# EAGLE board PCB_final (EAGLE 9.7.0)
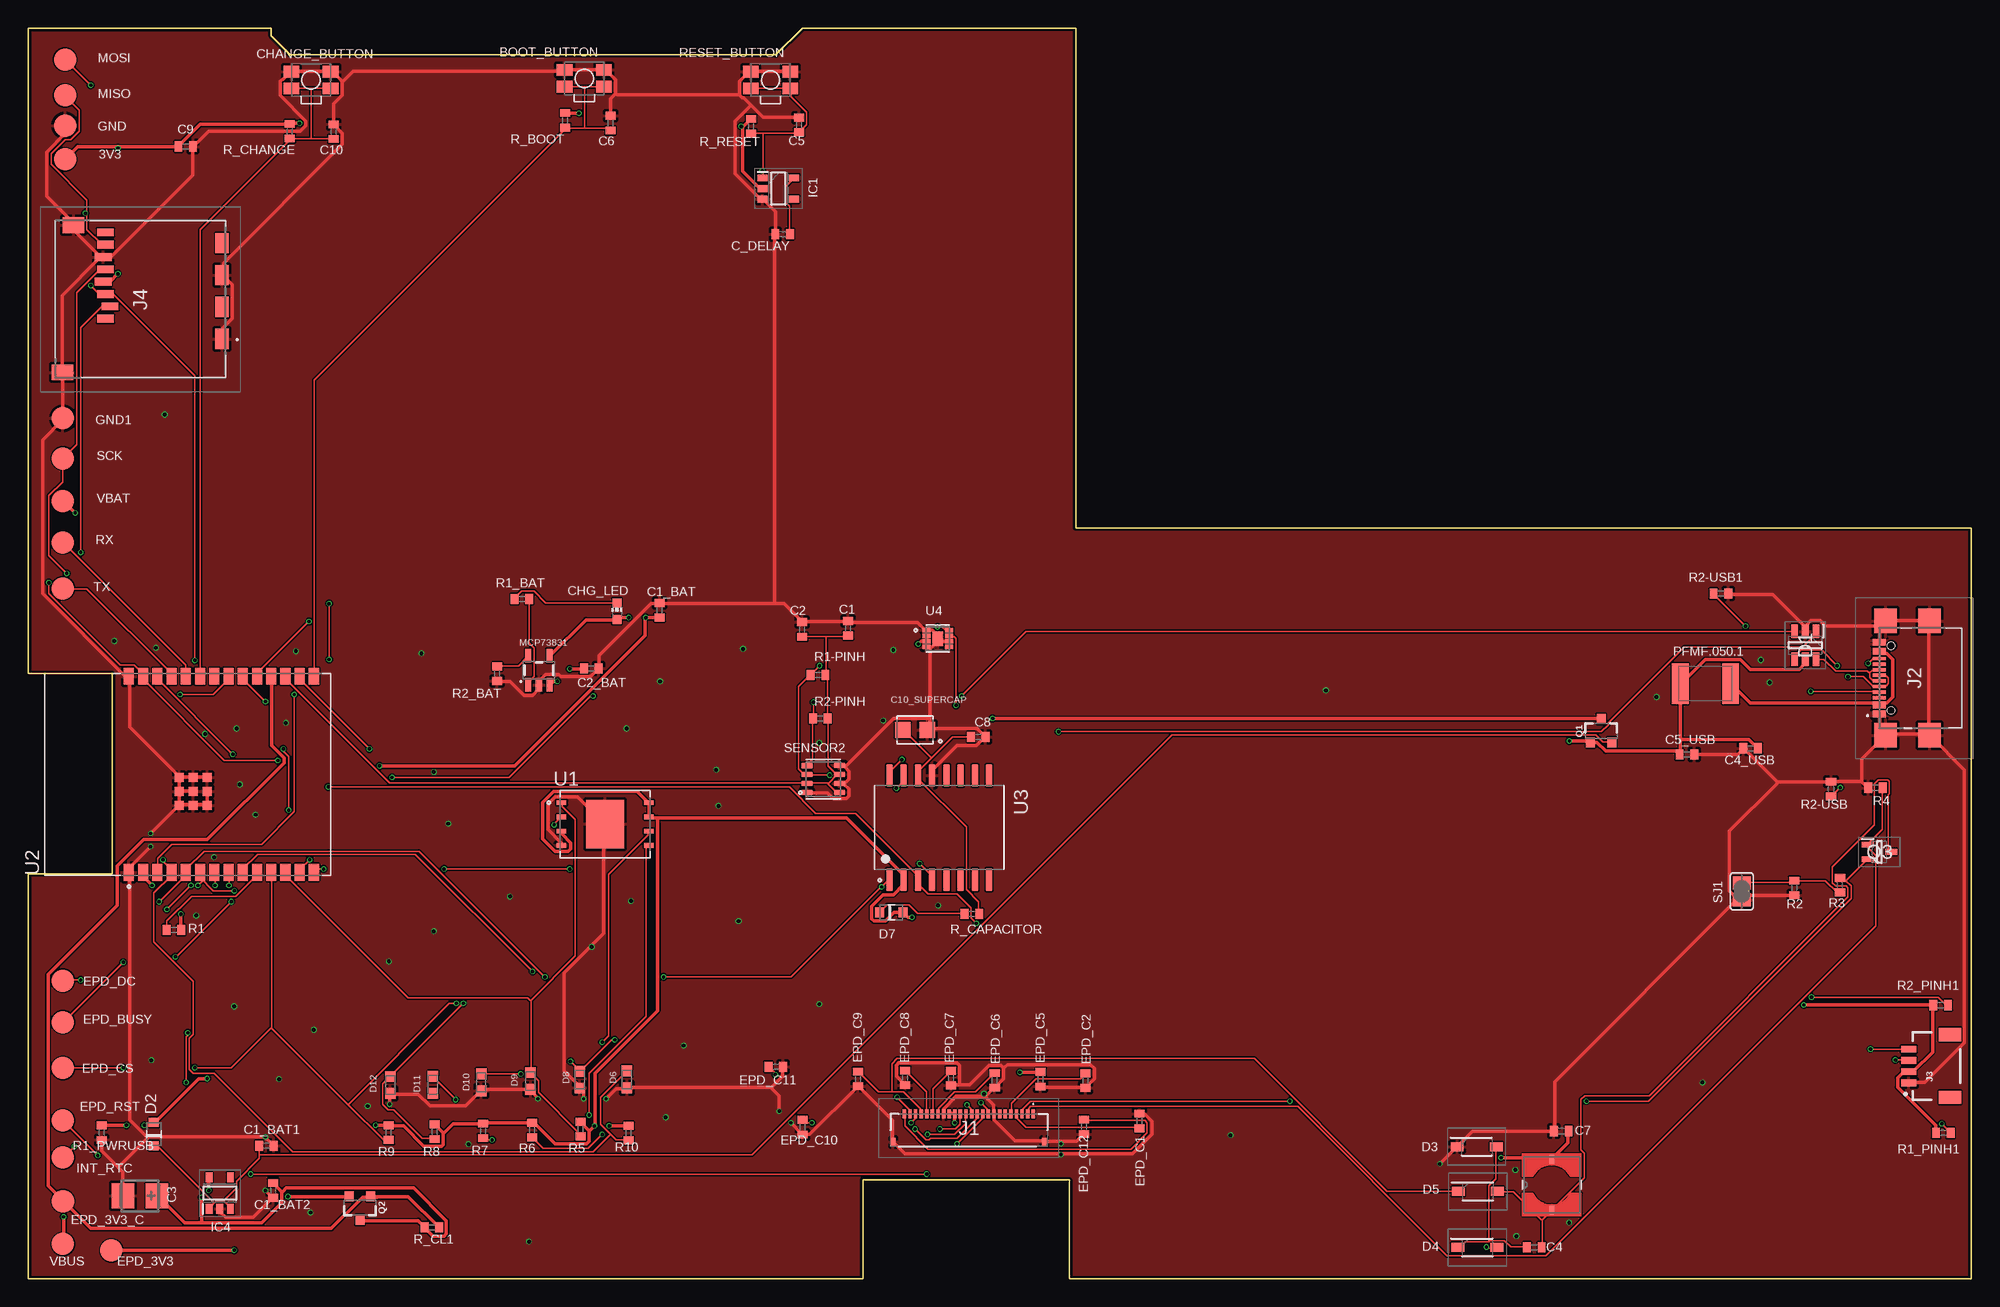
[diagram p0: board, top side]
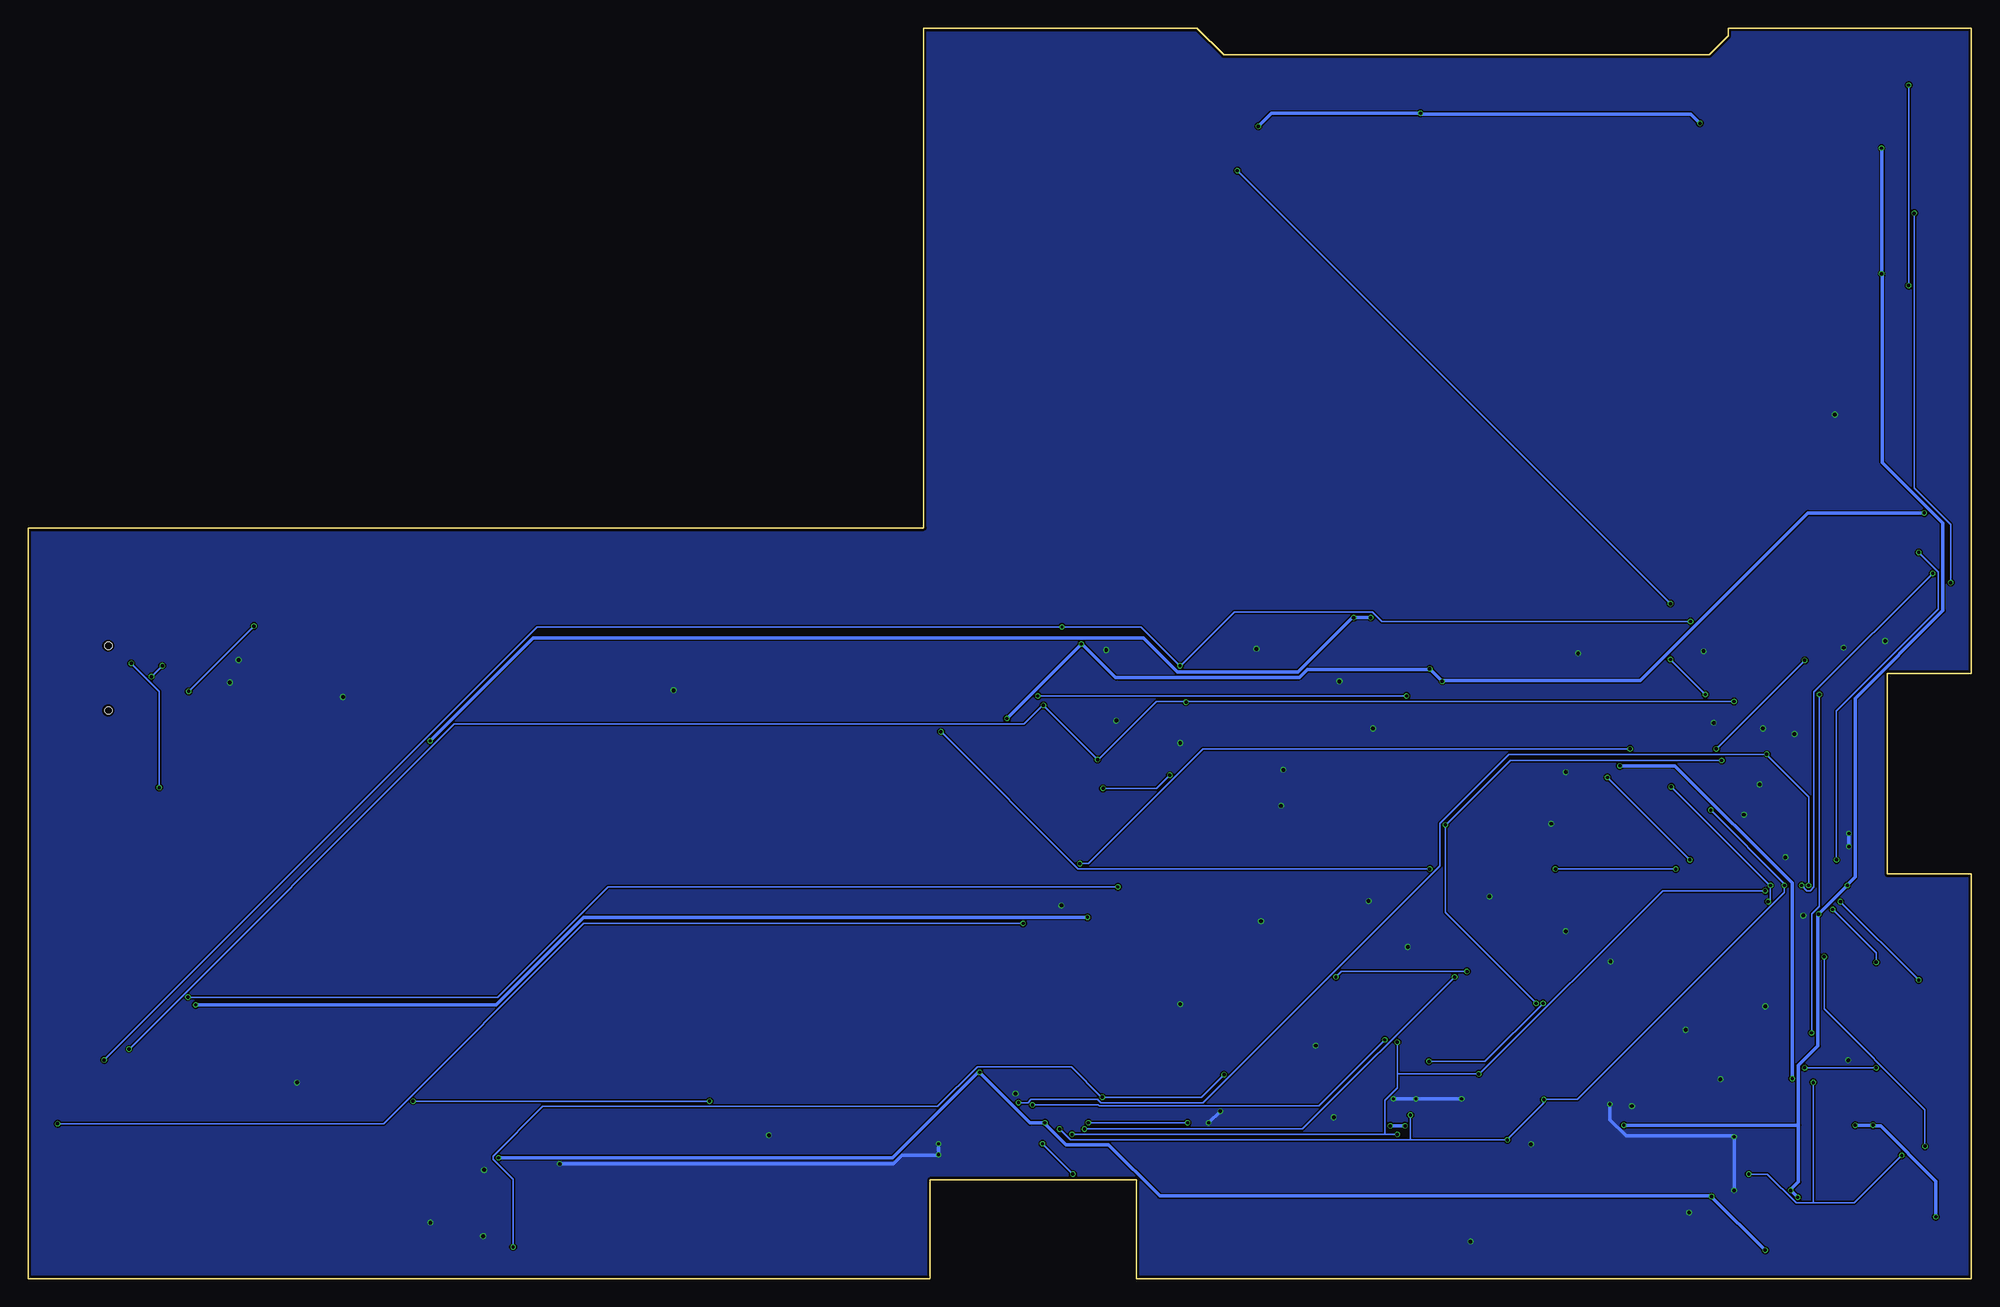
[diagram p1: board, bottom side, seen from below]

Size 173.4 x 111.6 mm. Coordinates in mm from the lower left corner, seen from the top.
Outline: 0,0 74.5,0 74.5,8.8 92.9,8.8 92.9,0 173.4,0 173.4,67 93.5,67 93.5,111.6 69.1,111.6 66.7,109.2 23.4,109.2 21.7,110.9 21.7,111.6 0,111.6 0,54 7.5,54 7.5,36.1 0,36.1 0,0
Copper layers (1*16): Top 0.035mm / dielectric 1.6mm / Bottom 0.035mm
Design rules "jlcpcb-2layers.dru": minimum track width 0.15mm, minimum drill 0.3mm, track to track 5mil, track to pad 5mil, pad to pad 5mil, via to via 5mil, smd to smd 5mil, copper to edge 0.2mm, drill to drill 6mil, minimum pad ring 10mil, minimum via ring 3mil, stop-mask expansion 4mil, vias tented up to drill 0mil, thermal gap 10mil
Net classes: 1 class-1: width 0.3 mm

## Footprints (pad centres in the part's own frame; a part is rotated, then mirrored left to right if it is on the bottom)
TP20R = smd 2 x 2: TP 0,0
MYBUTTON = smd 1.4 x 1.05: 1 1.75,0.75; 2 -1.75,0.75; 3 -1.75,-0.75; 4 1.75,-0.75
ESP32_WROVER_EAGLE-LTSPICE_C0402 = smd 0.7 x 0.9: 1 -0.65,0; 2 0.65,0
RCL_CT3528 = smd 2 x 2.2: + -1.5,0; - 1.5,0
CAPCP3225X100N = smd 1.4 x 1.4: 1 -1.1,0; 2 1.1,0
ADAFRUIT_CHIP-LED0603 = smd 0.8 x 0.8: A 0,-0.75; C 0,0.75
SOT95P280X145-6N = smd 1.2 x 0.6: 1 -1.25,0.95; 2 -1.25,0; 3 -1.25,-0.95; 4 1.25,-0.95; 5 1.25,0; 6 1.25,0.95
ESP32_WROVER_AVX---SD0805S020S1R0_AVX_SD0805S020S1R0_0 = smd 0.8 x 0.9: 1 -1.05,0; 2 1.05,0
SOD3716X135N = smd 1.15 x 0.8: 1 -1.75,0; 2 1.75,0
DIOC1608X36N = smd 0.97 x 0.94: 1 -0.75,0; 2 0.75,0
SOT95P280X125-5N = smd 0.9 x 0.6: 1 -1.4,0.95; 2 -1.4,0; 3 -1.4,-0.95; 4 1.4,-0.95; 5 1.4,0.95
SOT95P280X120-5N = smd 0.9 x 0.6: 1 -1.4,0.95; 2 -1.4,0; 3 -1.4,-0.95; 4 1.4,-0.95; 5 1.4,0.95
FH34SRJ24S05SH99 = smd 0.3 x 0.8: 1 5.75,1.45; 2 5.25,1.45; 3 4.75,1.45; 4 4.25,1.45; 5 3.75,1.45; 6 3.25,1.45; 7 2.75,1.45; 8 2.25,1.45; 9 1.75,1.45; 10 1.25,1.45; 11 0.75,1.45; 12 0.25,1.45; 13 -0.25,1.45; 14 -0.75,1.45; 15 -1.25,1.45; 16 -1.75,1.45; 17 -2.25,1.45; 18 -2.75,1.45; 19 -3.25,1.45; 20 -3.75,1.45; 21 -4.25,1.45; 22 -4.75,1.45; 23 -5.25,1.45; 24 -5.75,1.45 | smd 0.4 x 0.8: MP1 6.75,-1.05; MP2 -6.75,-1.05
SAMACSYS_PARTS_USB4110GFA = smd 0.3 x 1.15: A1 -3.35,3.678; A4 -2.55,3.678; A5 -1.25,3.678; A6 -0.25,3.678; A7 0.25,3.678; A8 1.25,3.678; A9 2.55,3.678; A12 3.35,3.678; B1 3.05,3.678; B4 2.25,3.678; B5 1.75,3.678; B6 0.75,3.678; B7 -0.75,3.678; B8 -1.75,3.678; B9 -2.25,3.678; B12 -3.05,3.678 | smd 2.18 x 2: MP1 -5.11,-0.827; MP2 5.11,-0.827; MP3 -5.11,3.103; MP4 5.11,3.103 | hole 0.65: -2.89,2.603; 2.89,2.603
JST04_1MM_RA = smd 0.6 x 1.35: 1 -1.5,0; 2 -0.5,0; 3 0.5,0; 4 1.5,0 | smd 1.2 x 2: NC1 2.8,-3.675; NC2 -2.8,-3.675
112ATAARR03ATTEND = smd 1.8 x 1.2: G1 10.6,10.4; G2 4.9,10.4; S1 7.75,10.4; S2 2.05,10.4 | smd 1.4 x 1.9: G3 13.6,-3.85; G4 0.45,-2.85 | smd 0.7 x 1.5: P1 8.8,0; P2 7.7,0.4; P3 6.6,0; P4 5.5,-0.2; P5 4.4,0; P6 3.3,-0.2; P7 2.2,0; P8 1.1,0
IND_4828-WE-TPC_WRE = smd 0.813 x 0.406: 1 -2.286,0; 2 2.286,0
ESP32_WROVER_SPARKFUN-IC-POWER_SOT23-5 = smd 0.55 x 1.2: 1 -0.95,-1.3; 2 0,-1.3; 3 0.95,-1.3; 4 0.95,1.3; 5 -0.95,1.3
ESP32C6_VARISTOR_CT/CN1812 = smd 1.5 x 3.6: 1 -2.25,0; 2 2.25,0
ESP32_WROVER_SPARKFUN-DISCRETESEMI_SOT23-3 = smd 0.8 x 0.9: 1 -0.95,-1; 2 0.95,-1; 3 0,1.1
SOT65P210X110-3N = smd 1.05 x 0.5: 1 -1.05,0.65; 2 -1.05,-0.65; 3 1.05,0
ESP32_WROVER_EAGLE-LTSPICE_R0402 = smd 0.7 x 0.9: 1 -0.65,0; 2 0.65,0
ESP32_WROVER_BME680_PSON80P300X300X100-8N = smd 1.016 x 0.5: 1 1.458,1.2; 2 1.458,0.4; 3 1.458,-0.4; 4 1.458,-1.2; 5 -1.458,-1.22; 6 -1.458,-0.4; 7 -1.458,0.4; 8 -1.458,1.2
SJ = smd 1.168 x 1.6: 1 -0.762,0; 2 0.762,0
SON127P600X800X80-9N = smd 0.94 x 0.44: 1 -3.895,1.905; 2 -3.895,0.635; 3 -3.895,-0.635; 4 -3.895,-1.905; 5 3.895,-1.905; 6 3.895,-0.635; 7 3.895,0.635; 8 3.895,1.905 | smd 3.4 x 4.3: 9 0,0
XCVR_ESP32-C6-WROOM-1-N8 = smd 1.5 x 0.9: 1 -8.75,5.26; 2 -8.75,3.99; 3 -8.75,2.72; 4 -8.75,1.45; 5 -8.75,0.18; 6 -8.75,-1.09; 7 -8.75,-2.36; 8 -8.75,-3.63; 9 -8.75,-4.9; 10 -8.75,-6.17; 11 -8.75,-7.44; 12 -8.75,-8.71; 13 -8.75,-9.98; 14 -8.75,-11.25; 15 8.75,-11.25; 16 8.75,-9.98; 17 8.75,-8.71; 18 8.75,-7.44; 19 8.75,-6.17; 20 8.75,-4.9; 21 8.75,-3.63; 22 8.75,-2.36; 23 8.75,-1.09; 24 8.75,0.18; 25 8.75,1.45; 26 8.75,2.72; 27 8.75,3.99; 28 8.75,5.26 | smd 0.8 x 0.8: 29_1 -2.755,0.79; 29_2 -1.505,0.79; 29_3 -0.255,0.79; 29_4 -2.755,-0.46; 29_5 -1.505,-0.46; 29_6 -0.255,-0.46; 29_7 -2.755,-1.71; 29_8 -1.505,-1.71; 29_9 -0.255,-1.71
SOIC127P1032X265-16N = smd 2.05 x 0.59: 1 -4.655,4.445; 2 -4.655,3.175; 3 -4.655,1.905; 4 -4.655,0.635; 5 -4.655,-0.635; 6 -4.655,-1.905; 7 -4.655,-3.175; 8 -4.655,-4.445; 9 4.655,-4.445; 10 4.655,-3.175; 11 4.655,-1.905; 12 4.655,-0.635; 13 4.655,0.635; 14 4.655,1.905; 15 4.655,3.175; 16 4.655,4.445
SON50P200X200X80-9N = smd 0.813 x 0.406: 1 -0.985,0.75; 2 -0.985,0.25; 3 -0.985,-0.25; 4 -0.985,-0.75; 5 0.985,-0.75; 6 0.985,-0.25; 7 0.985,0.25; 8 0.985,0.75 | smd 0.9 x 1.3: 9 0,0

## Placement (x,y rotation side)
3V3  TPMODEL  [TP20R]  3.32,99.89 0 top
BOOT_BUTTON  BUTTON_CUSYOMV1BUTON  [MYBUTTON]  49.63,107.11 0 top
C1  100nF  [ESP32_WROVER_EAGLE-LTSPICE_C0402]  73.17,58.05 90 top
C1_BAT  4.7uF  [ESP32_WROVER_EAGLE-LTSPICE_C0402]  56.35,59.64 90 top
C1_BAT1  4.7uF  [ESP32_WROVER_EAGLE-LTSPICE_C0402]  21.28,11.87 0 top
C1_BAT2  4.7uF  [ESP32_WROVER_EAGLE-LTSPICE_C0402]  21.87,7.88 270 top
C2  100nF  [ESP32_WROVER_EAGLE-LTSPICE_C0402]  69.07,57.93 90 top
C2_BAT  4.7uF  [ESP32_WROVER_EAGLE-LTSPICE_C0402]  50.25,54.45 0 top
C3  100uF TANT  [RCL_CT3528]  9.99,7.4 180 top
C4  4.7uF/25V  [ESP32_WROVER_EAGLE-LTSPICE_C0402]  134.39,2.79 0 top
C4_USB  100nF  [ESP32_WROVER_EAGLE-LTSPICE_C0402]  153.7,47.33 180 top
C5  1uF  [ESP32_WROVER_EAGLE-LTSPICE_C0402]  68.79,102.95 90 top
C5_USB  4.7uF  [ESP32_WROVER_EAGLE-LTSPICE_C0402]  148.01,46.77 0 top
C6  100nF  [ESP32_WROVER_EAGLE-LTSPICE_C0402]  51.97,103.11 90 top
C7  10uF  [ESP32_WROVER_EAGLE-LTSPICE_C0402]  136.8,13.17 180 top
C8  100nF  [ESP32_WROVER_EAGLE-LTSPICE_C0402]  84.79,48.33 0 top
C9  100nF  [ESP32_WROVER_EAGLE-LTSPICE_C0402]  14.07,101.03 0 top
C10  100nF  [ESP32_WROVER_EAGLE-LTSPICE_C0402]  27.27,102.35 90 top
C10_SUPERCAP  CPH3225ASUPERCAP  [CAPCP3225X100N]  79.14,48.96 180 top
C_DELAY  100nF  [ESP32_WROVER_EAGLE-LTSPICE_C0402]  67.33,93.21 180 top
CHANGE_BUTTON  BUTTON_CUSYOMV1BUTON  [MYBUTTON]  25.26,106.96 0 top
CHG_LED  [ADAFRUIT_CHIP-LED0603]  52.54,59.55 0 top
D1  USBLC6-2SC6YUSBL  [SOT95P280X145-6N]  158.57,56.52 270 top
D2  ESP32_WROVER_AVX---SD0805S020S1R0_AVX_SD0805S020S1R0_0_0  [ESP32_WROVER_AVX---SD0805S020S1R0_AVX_SD0805S020S1R0_0]  11.22,12.89 90 top
D3  MBR0530MBR  [SOD3716X135N]  129.26,11.77 0 top
D4  MBR0530MBR  [SOD3716X135N]  129.32,2.78 0 top
D5  MBR0530MBR  [SOD3716X135N]  129.36,7.78 0 top
D6  PGB1010603MRDIOC  [DIOC1608X36N]  53.43,17.78 90 top
D7  ESP32_WROVER_AVX---SD0805S020S1R0_AVX_SD0805S020S1R0_0_0  [ESP32_WROVER_AVX---SD0805S020S1R0_AVX_SD0805S020S1R0_0]  77.04,32.68 0 top
D8  PGB1010603MRDIOC  [DIOC1608X36N]  49.23,17.76 90 top
D9  PGB1010603MRDIOC  [DIOC1608X36N]  44.83,17.64 90 top
D10  PGB1010603MRDIOC  [DIOC1608X36N]  40.43,17.52 90 top
D11  PGB1010603MRDIOC  [DIOC1608X36N]  36.13,17.3 90 top
D12  PGB1010603MRDIOC  [DIOC1608X36N]  32.33,17.28 90 top
EPD_3V3  TPMODEL  [TP20R]  7.44,2.52 0 top
EPD_3V3_C  TPMODEL  [TP20R]  3.12,6.91 0 top
EPD_BUSY  TPMODEL  [TP20R]  3.12,22.89 0 top
EPD_C1  1uF/50V  [ESP32_WROVER_EAGLE-LTSPICE_C0402]  99.17,14.08 270 top
EPD_C2  1uF/50V  [ESP32_WROVER_EAGLE-LTSPICE_C0402]  94.35,17.68 90 top
EPD_C5  1uF/50V  [ESP32_WROVER_EAGLE-LTSPICE_C0402]  90.35,17.79 90 top
EPD_C6  1uF/50V  [ESP32_WROVER_EAGLE-LTSPICE_C0402]  86.25,17.7 90 top
EPD_C7  1uF/50V  [ESP32_WROVER_EAGLE-LTSPICE_C0402]  82.35,17.91 90 top
EPD_C8  1uF/50V  [ESP32_WROVER_EAGLE-LTSPICE_C0402]  78.25,17.92 90 top
EPD_C9  1uF/50V  [ESP32_WROVER_EAGLE-LTSPICE_C0402]  74.05,17.83 90 top
EPD_C10  1uF/50V  [ESP32_WROVER_EAGLE-LTSPICE_C0402]  69.11,13.51 90 top
EPD_C11  1uF/50V  [ESP32_WROVER_EAGLE-LTSPICE_C0402]  66.71,18.91 180 top
EPD_C12  1uF/50V  [ESP32_WROVER_EAGLE-LTSPICE_C0402]  94.21,13.55 90 top
EPD_CS  TPMODEL  [TP20R]  3.12,18.81 0 top
EPD_DC  TPTP20R  [TP20R]  3.12,26.59 0 top
EPD_RST  TPMODEL  [TP20R]  3.12,14.11 0 top
GND  TPTP20R  [TP20R]  3.32,102.89 0 top
GND1  TPTP20R  [TP20R]  3.12,76.79 0 top
IC1  BD5229G-TRBD5229  [SOT95P280X125-5N]  66.95,97.27 0 top
IC4  XC6220A331MR-G  [SOT95P280X120-5N]  17.11,7.63 90 top
INT_RTC  TPMODEL  [TP20R]  3.12,10.81 0 top
J1  FH34SRJ-24S-0.5SH_99_FH34  [FH34SRJ24S05SH99]  83.94,13.24 0 top
J2  SAMACSYS_PARTS_USB4110-GF-AUSB  [SAMACSYS_PARTS_USB4110GFA]  168.84,53.59 90 top
J3  QWIIC_RIGHT_ANGLE  [JST04_1MM_RA]  167.81,18.98 90 top
J4  112A-TAAR-R03_ATTENDSDCARD  [112ATAARR03ATTEND]  6.92,94.46 270 top
L1  68uH  [IND_4828-WE-TPC_WRE]  135.95,8.37 90 top
MCP73831  ESP32_WROVER_SPARKFUN-IC-POWER_MCP73831ICPOWER  [ESP32_WROVER_SPARKFUN-IC-POWER_SOT23-5]  45.58,54.29 0 top
MISO  TPTP20R  [TP20R]  3.32,105.59 0 top
MOSI  TPMODEL  [TP20R]  3.32,108.78 0 top
PFMF.050.1  ESP32C6_VARISTOR  [ESP32C6_VARISTOR_CT/CN1812]  149.66,53.1 180 top
Q1  20V/4.2A/52mΩ/1.4W  [ESP32_WROVER_SPARKFUN-DISCRETESEMI_SOT23-3]  140.36,48.86 0 top
Q2  20V/4.2A/52mΩ/1.4W  [ESP32_WROVER_SPARKFUN-DISCRETESEMI_SOT23-3]  29.62,6.34 180 top
Q3  SI1308EDL-T1-GE3SI13  [SOT65P210X110-3N]  165.19,38.08 0 top
R1  10K  [ESP32_WROVER_EAGLE-LTSPICE_R0402]  13.01,31.11 0 top
R1-PINH  10K  [ESP32_WROVER_EAGLE-LTSPICE_R0402]  70.48,53.87 0 top
R1_BAT  200  [ESP32_WROVER_EAGLE-LTSPICE_R0402]  44.06,60.65 0 top
R1_PINH1  10K  [ESP32_WROVER_EAGLE-LTSPICE_R0402]  170.89,13.01 180 top
R1_PWRUSB  100K  [ESP32_WROVER_EAGLE-LTSPICE_R0402]  6.56,13.02 90 top
R2  2.2  [ESP32_WROVER_EAGLE-LTSPICE_R0402]  157.59,34.87 90 top
R2-PINH  10K  [ESP32_WROVER_EAGLE-LTSPICE_R0402]  70.69,49.97 0 top
R2-USB  5k1  [ESP32_WROVER_EAGLE-LTSPICE_R0402]  160.87,43.69 90 top
R2-USB1  5k1  [ESP32_WROVER_EAGLE-LTSPICE_R0402]  151.04,61.13 180 top
R2_BAT  2K  [ESP32_WROVER_EAGLE-LTSPICE_R0402]  41.87,53.98 90 top
R2_PINH1  10K  [ESP32_WROVER_EAGLE-LTSPICE_R0402]  170.65,24.41 180 top
R3  0.47  [ESP32_WROVER_EAGLE-LTSPICE_R0402]  161.67,35.12 90 top
R4  10K  [ESP32_WROVER_EAGLE-LTSPICE_R0402]  164.83,43.81 0 top
R5  10K  [ESP32_WROVER_EAGLE-LTSPICE_R0402]  49.29,13.35 90 top
R6  10K  [ESP32_WROVER_EAGLE-LTSPICE_R0402]  44.99,13.27 90 top
R7  10K  [ESP32_WROVER_EAGLE-LTSPICE_R0402]  40.59,13.19 90 top
R8  10K  [ESP32_WROVER_EAGLE-LTSPICE_R0402]  36.29,13.11 90 top
R9  10K  [ESP32_WROVER_EAGLE-LTSPICE_R0402]  32.19,13.03 90 top
R10  10K  [ESP32_WROVER_EAGLE-LTSPICE_R0402]  53.59,12.99 90 top
R_BOOT  10K  [ESP32_WROVER_EAGLE-LTSPICE_R0402]  47.93,103.37 90 top
R_CAPACITOR  15  [ESP32_WROVER_EAGLE-LTSPICE_R0402]  84.22,32.54 0 top
R_CHANGE  10K  [ESP32_WROVER_EAGLE-LTSPICE_R0402]  23.36,102.39 90 top
R_CL1  10K  [ESP32_WROVER_EAGLE-LTSPICE_R0402]  36.03,4.57 180 top
R_RESET  10K  [ESP32_WROVER_EAGLE-LTSPICE_R0402]  64.51,102.83 90 top
RESET_BUTTON  BUTTON_CUSYOMV1BUTON  [MYBUTTON]  66.25,106.96 0 top
RX  TPMODEL  [TP20R]  3.12,65.69 0 top
SCK  TPMODEL  [TP20R]  3.12,73.19 0 top
SENSOR2  ESP32_WROVER_BME680_BME680BME  [ESP32_WROVER_BME680_PSON80P300X300X100-8N]  70.96,44.58 180 top
SJ1  [SJ]  152.91,34.56 90 top
TX  TPMODEL  [TP20R]  3.12,61.59 0 top
U1  W25Q512JVEIQ"  [SON127P600X800X80-9N]  51.49,40.56 0 top
U2  ESP32-C6-WROOM-1-N8  [XCVR_ESP32-C6-WROOM-1-N8]  14.26,45 90 top
U3  DS3231SN#DS3231  [SOIC127P1032X265-16N]  81.3,40.25 90 top
U4  MAX17048G+T10MAX170  [SON50P200X200X80-9N]  81.17,57.12 0 top
VBAT  TPMODEL  [TP20R]  3.12,69.39 0 top
VBUS  TPTP20R  [TP20R]  3.12,3.11 0 top

## Library data of the parts
3V3 BOOT_BUTTON C1 C1_BAT C1_BAT1 C1_BAT2 C2 C2_BAT C3 C4 C4_USB C5 C5_USB C6-C10 C10_SUPERCAP C_DELAY CHANGE_BUTTON CHG_LED D1-D12 EPD_3V3 EPD_3V3_C EPD_BUSY EPD_C1 EPD_C2 EPD_C5-EPD_C12 EPD_CS EPD_DC EPD_RST GND GND1 IC1 INT_RTC J1-J4 L1 MCP73831 MISO MOSI PFMF.050.1 Q1-Q3 R1 R1-PINH R1_BAT R1_PINH1 R1_PWRUSB R2 R2-PINH R2-USB R2-USB1 R2_BAT R2_PINH1 R3-R10 R_BOOT R_CAPACITOR R_CHANGE R_CL1 R_RESET RESET_BUTTON RX SCK SENSOR2 SJ1 TX U1-U4 VBAT VBUS = DeskAssistant v19 v1
IC4 = DeskAssistant v19 v1; DESCRIPTION: LDO Voltage Regulators; HEIGHT: 1.2mm; MANUFACTURER_NAME: Torex; MANUFACTURER_PART_NUMBER: XC6220A331MR-G; MOUSER_PART_NUMBER: 865-XC6220A331MR-G; MOUSER_PRICE-STOCK: https://www.mouser.co.uk/ProductDetail/Torex-Semiconductor/XC6220A331MR-G?qs=AsjdqWjXhJ8ZSWznL1J0gg%3D%3D

## Nets
3V3 [class-1]: 3V3.TP C1_BAT2.1 C3.+ C9.1 D7.2 IC1.2 IC4.5 J3.2 J4.P4 Q2.3 R1.2 R1_PINH1.2 R2_PINH1.2 R5.2 R6.2 R7.2 R8.2 R9.2 R10.2 R_BOOT.2 R_CHANGE.2 R_CL1.2 R_RESET.2 U1.3 U1.7 U1.8 U2.2 U3.2
32KHZ: R2_PINH1.1 U2.9 U3.1
DN: D1.4 J2.A7 J2.B7
DP: D1.6 J2.A6 J2.B6
EPD_3V3 [class-1]: C7.1 EPD_3V3.TP EPD_C5.2 J1.15 J1.16 L1.2 Q2.2
EPD_3V3_C [class-1]: EPD_3V3_C.TP Q2.1 R_CL1.1 U2.18
EPD_BUSY: EPD_BUSY.TP J1.9 U2.26
EPD_CS: D8.2 EPD_CS.TP J1.12 R9.1 U2.11
EPD_DC: EPD_DC.TP J1.11 U2.5
EPD_RST: EPD_RST.TP J1.10 U2.21
FLASH_CS: D9.2 R5.1 U1.1 U2.12
GDR: J1.2 Q3.1 R4.2
GND [class-1]: BOOT_BUTTON.1 BOOT_BUTTON.2 C1.2 C1_BAT1.2 C1_BAT2.2 C1_BAT.2 C2.2 C2_BAT.2 C3.- C4_USB.2 C5.2 C5_USB.2 C6.2 C7.2 C8.2 C9.2 C10.2 C10_SUPERCAP.1 C_DELAY.2 CHANGE_BUTTON.1 CHANGE_BUTTON.2 D1.2 D3.1 D6.1 D8.1 D9.1 D10.1 D12.1 EPD_C1.1 EPD_C2.1 EPD_C5.1 EPD_C6.1 EPD_C7.1 EPD_C8.1 EPD_C9.1 EPD_C10.1 EPD_C11.1 EPD_C12.1 GND1.TP GND.TP IC1.3 IC4.2 J1.8 J1.17 J1.MP1 J1.MP2 J2.A1 J2.A12 J2.B1 J2.B12 J2.MP1 J2.MP2 J2.MP3 J2.MP4 J3.1 J4.G1 J4.G2 J4.G3 J4.G4 J4.P6 MCP73831.2 R1_PWRUSB.1 R2-USB1.1 R2-USB.2 R2.1 R2_BAT.1 R4.1 RESET_BUTTON.1 RESET_BUTTON.2 SENSOR2.1 SENSOR2.5 SENSOR2.7 SJ1.1 U1.4 U1.9 U2.1 U2.28 U2.29_1 U2.29_2 U2.29_3 U2.29_4 U2.29_5 U2.29_6 U2.29_7 U2.29_8 U2.29_9 U3.13 U4.1 U4.4 U4.6 U4.9
GPIO8: R1.1 U2.10
I2C_PW: C1.1 C2.1 R1-PINH.2 R2-PINH.2 SENSOR2.2 SENSOR2.6 SENSOR2.8 U2.17
INT_RTC: INT_RTC.TP R1_PINH1.1 U2.8 U3.3
IO/BOOT: BOOT_BUTTON.3 BOOT_BUTTON.4 C6.1 R_BOOT.1 U2.15
IO/CHANGE: C10.1 CHANGE_BUTTON.3 CHANGE_BUTTON.4 R_CHANGE.1 U2.23
MISO: D12.2 J4.P7 MISO.TP R8.1 U1.2 U2.27
MOSI: D11.2 J1.14 J4.P3 MOSI.TP R7.1 U1.5 U2.7
N$1: J2.B5 R2-USB.1
N$2: J2.A5 R2-USB1.2
N$3: C1_BAT1.1 D2.1 IC4.1 IC4.3 Q1.2
N$4: C4.1 D3.2 D4.1
N$5: CHG_LED.C R1_BAT.1
N$6: MCP73831.1 R1_BAT.2
N$7: MCP73831.5 R2_BAT.2
N$8: EPD_C12.2 J1.24
N$9: EPD_C8.2 J1.20
N$10: EPD_C10.2 J1.22
N$11: EPD_C7.2 J1.19
N$12: EPD_C6.2 J1.18
N$13: EPD_C2.2 J1.5
N$14: EPD_C1.2 J1.4
N$15: C_DELAY.1 IC1.5
N$16: D7.1 R_CAPACITOR.1
N$26: D11.1
PREVGH: D5.1 EPD_C9.2 J1.21
PREVGL: D4.2 EPD_C11.2 J1.23
RESE: J1.3 Q3.2 R3.2
RESE': R2.2 R3.1 SJ1.2
RESET: C5.1 IC1.1 R_RESET.1 RESET_BUTTON.3 RESET_BUTTON.4 U2.3
RTC_RST: U2.16 U3.4
RX: RX.TP U2.24
SCK: D10.2 J1.13 J4.P5 R6.1 SCK.TP U1.6 U2.6
SCL: J3.4 R2-PINH.1 SENSOR2.4 U2.20 U3.16 U4.7
SDA: J3.3 R1-PINH.1 SENSOR2.3 U2.19 U3.15 U4.8
SRC: C4.2 D5.2 L1.1 Q3.3
SS_SD: D6.2 J4.P2 R10.1 U2.4
TX: TX.TP U2.25
USB_D+: D1.1 U2.14
USB_D-: D1.3 U2.13
VBAT [class-1]: C2_BAT.1 MCP73831.3 Q1.3 U4.2 U4.3 VBAT.TP
VBUS [class-1]: C1_BAT.1 C4_USB.1 C5_USB.1 CHG_LED.A D1.5 D2.2 MCP73831.4 PFMF.050.1.2 Q1.1 R1_PWRUSB.2 VBUS.TP
VRTC: C8.1 C10_SUPERCAP.2 R_CAPACITOR.2 U3.14
VUSB [class-1]: J2.A4 J2.A9 J2.B4 J2.B9 PFMF.050.1.1

## Tracks (layer width: path | path; a pad name or v marks a point on that pad's centre or on a via)
3V3  (via drill 0.3)
  Top 0.3: 63.77,102.75 63.77,98.8 65.29,97.28 65.5,97.28 IC1.2 | 63.77,102.75 64.46,103.44 R_RESET.2 | v49.16,104 47.98,104 R_BOOT.2 | v63.63,102.82 63.77,102.75 | 8.03,101.02 4.42,101.02 3.32,99.91 3V3.TP | 8.03,101.02 13.36,101.02 C9.1 13.5,101.16 15.37,103.03 23.33,103.03 R_CHANGE.2 23.47,103.1 v24.23,103.1 | v8.03,89.66 7.33,88.97 6.78,88.97 J4.P4 | v8.03,100.88 8.03,101.02 | v13.63,32.53 13.63,31.15 R1.2 | v11.07,35.09 10.31,35.86 10.31,36.2 U2.2 | 22.64,7.74 21.88,8.5 C1_BAT2.1 | 22.64,7.74 22.64,6.77 20.84,4.97 15.5,4.97 | 15.5,4.97 13.98,4.97 11.56,7.39 C3.+ | v16.13,7.88 16.13,8.99 IC4.5 | 15.5,4.97 v15.5,7.26 | 22.64,7.74 22.78,7.81 23.05,8.09 34.41,8.09 37.32,5.18 37.32,4 37.11,3.79 36.14,3.79 35.45,4.49 R_CL1.2 35.38,4.62 34.83,5.18 29.68,5.18 Q2.3 | 37.04,13 37.04,11.96 36.9,11.83 35.31,11.83 33.51,13.63 32.19,13.63 R9.2 32.05,13.7 v31.02,13.7 | 37.04,13 36.35,13.7 R8.2 | 37.04,13 37.18,13.07 37.94,13.83 40.57,13.83 R7.2 40.71,13.9 44.94,13.9 R6.2 45.14,13.9 47.01,12.03 49.85,12.03 50.06,12.24 50.06,13.21 | 50.06,13.21 49.3,13.97 R5.2 | v51.86,13.63 53.52,13.63 R10.2 | 50.06,13.21 50.2,13.28 v50.54,13.63 50.61,13.77 50.61,18.34 56.15,23.88 56.15,41.12 | R1_PINH1.2 170.21,13.07 170.21,13.7 166.81,17.09 166.81,17.92 167.37,18.47 167.78,18.47 J3.2 167.92,18.54 168.27,18.54 169.93,20.2 169.93,24.36 R2_PINH1.2 169.79,24.43 v158.44,24.43 | U1.3 47.64,39.87 47.64,39.66 48.4,38.9 48.4,38.35 48.19,38.14 47.01,38.14 45.91,39.25 45.91,42.5 46.87,43.47 54.35,43.47 55.32,42.5 U1.8 55.39,42.37 55.39,41.26 U1.7 55.46,41.12 56.15,41.12 | 56.15,41.12 73.05,41.12 78.04,36.13 78.04,35.72 U3.2 78.11,35.58 78.11,35.16 77.21,34.26 76.31,34.26 75.27,33.23 75.27,32.12 75.47,31.91 76.51,31.91 77.27,32.67 78.04,32.67 D7.2 78.17,32.6 78.52,32.26 v78.87,32.26
  Bottom 0.3: v63.63,102.82 62.45,104 v49.16,104 49.02,103.93 25.06,103.93 v24.23,103.1 | v8.03,100.88 v8.03,89.66 7.96,89.53 7.96,72.84 2.55,67.43 2.55,59.61 10.38,51.78 10.38,35.86 11,35.23 v11.07,35.09 v13.63,32.53 13.7,32.39 13.7,20.76 15.44,19.03 15.44,13.7 | v15.5,7.26 v16.13,7.88 16.06,8.02 15.44,8.64 15.44,13.7 | v50.54,13.63 v51.86,13.63 | v158.44,24.43 131.64,24.43 123.81,32.26 v78.87,32.26 | v31.02,13.7 15.44,13.7
32KHZ  (via drill 0.3)
  Top 0.15: v159.13,25.12 170.42,25.12 171.11,24.43 171.25,24.43 R2_PINH1.1 | U3.1 76.79,35.58 v76.17,34.96 76.1,34.96 68.06,26.92 v56.71,26.92 | v45,27.41 34.55,37.86 20.49,37.86 19.17,36.55 19.17,36.27 U2.9
  Bottom 0.15: v159.13,25.12 131.5,25.12 121.66,34.96 v76.17,34.96 | v45,27.41 56.22,27.41 v56.71,26.92
DN  (via drill 0.3)
  Top 0.15: J2.A7 165.22,53.79 165.78,53.79 165.98,53.58 165.98,53.1 165.78,52.89 165.22,52.89 J2.B7 165.15,52.89 164.6,52.89 163.77,53.72 v162.38,53.72 | v161.41,54.69 160.03,56.08 158.16,56.08 157.67,55.59 157.67,55.31 D1.4
  Bottom 0.15: v162.38,53.72 v161.41,54.69
DP
  Top 0.15: 164.32,54.07 164.32,53.65 164.6,53.38 165.15,53.38 J2.A6 | 164.32,54.07 164.53,54.28 165.15,54.28 J2.B6 | D1.6 159.54,55.25 160.24,55.25 161.28,54.21 164.11,54.21 164.25,54.07 164.32,54.07
EPD_3V3  (via drill 0.3)
  Top 0.3: v23.19,7.33 28.66,7.33 Q2.2 | v18.41,2.55 7.47,2.55 EPD_3V3.TP | C7.1 137.38,13.14 137.38,12.1 136,10.72 L1.2 135.86,10.79 v131.43,10.79 | J1.16 82.19,14.74 82.68,14.74 J1.15 82.68,14.6 v82.68,13.9 | v88.49,18.4 90.29,18.4 EPD_C5.2
  Bottom 0.3: v18.41,2.55 v23.19,7.33 23.33,7.39 72.43,7.39 77,11.96 80.81,11.96 82.61,13.77 v82.68,13.9 83.99,13.9 v88.49,18.4 88.63,18.4 96.25,10.79 v131.43,10.79
EPD_3V3_C
  Top 0.3: 31.2,7.33 33.93,7.33 36.62,4.62 R_CL1.1 | 30.6,7.33 Q2.1 30.46,7.26 | U2.18 21.74,53.72 21.74,47.56 22.84,46.45 22.84,46.04 15.99,39.18 10.31,39.18 7.96,36.82 7.96,33.29 1.79,27.13 1.79,8.29 3.11,6.98 EPD_3V3_C.TP 3.25,6.84 5.6,4.49 27.07,4.49 29.84,7.26 30.1,7.26 | 30.1,7.26 30.46,7.26 | 30.1,7.26 30.17,7.33 30.6,7.33 | 31.2,7.33 31.13,7.26 30.46,7.26 | 31.2,7.33 30.6,7.33
EPD_BUSY  (via drill 0.3)
  Top 0.15: v85.03,15.7 85.65,15.08 85.65,14.74 J1.9 | v18.27,46.8 11.56,53.52 11.56,53.72 U2.26 | v8.51,28.24 3.18,22.91 EPD_BUSY.TP | v14.53,35.09 v12.39,32.95
  Bottom 0.15: v85.03,15.7 84.2,15.7 83.92,15.98 77.97,15.98 77.69,15.7 68.55,15.7 47.43,36.82 47.43,40.63 41.27,46.8 v18.27,46.8 18.27,46.73 14.53,42.99 v14.53,35.09 | v8.51,28.24 8.51,29.07 v12.39,32.95
EPD_CS  (via drill 0.3)
  Top 0.15: v83.78,15.5 84.13,15.15 84.13,14.74 J1.12 | v52.34,21.31 52.07,21.31 49.3,18.54 D8.2 49.23,18.54 v48.4,19.37 | 21.74,22.35 28.56,15.53 | 28.56,15.53 31.71,12.38 32.12,12.38 R9.1 | 21.74,22.35 21.74,36.2 U2.11 | v8.51,18.82 3.18,18.82 EPD_CS.TP | v14.88,18.82 18.14,18.82 21.67,22.35 21.74,22.35 | v38.22,24.57 37.59,24.57 28.56,15.53
  Bottom 0.15: v83.78,15.5 77.9,15.5 77.83,15.43 58.23,15.43 v52.34,21.31 | v14.88,18.82 v8.51,18.82 | v48.4,19.37 43.41,19.37 v38.22,24.57
EPD_DC  (via drill 0.3)
  Top 0.15: v79.14,13.35 80.11,12.38 80.39,12.38 80.53,12.52 82.88,12.52 84.68,14.32 84.68,14.67 J1.11 | v46.11,26.92 34.89,38.14 15.71,38.14 14.12,36.55 14.12,36.27 U2.5 14.05,36.2 14.05,35.99 v11.7,33.64 | v4.7,26.65 3.18,26.65 EPD_DC.TP
  Bottom 0.15: v79.14,13.35 59.69,13.35 v46.11,26.92 | v11.7,33.64 v4.7,26.65
EPD_RST  (via drill 0.3)
  Top 0.15: v82.88,12.03 85.17,14.32 85.17,14.67 J1.10 | v19.87,9.33 v80.18,9.33 | v6.22,11 3.18,14.04 EPD_RST.TP | v13.56,52.13 16.54,52.13 17.86,53.45 17.86,53.72 U2.21 | v14.26,21.94 14.26,21.73 14.12,21.59 v14.12,17.5
  Bottom 0.15: v80.18,9.33 v82.88,12.03 | v19.87,9.33 18.21,9.33 15.64,6.77 14.12,6.77 | 14.12,6.77 10.45,6.77 v6.22,11 | v13.56,52.13 13.56,33.23 14.26,32.53 v14.26,21.94 | 14.12,6.77 v14.12,17.5
FLASH_CS
  Top 0.15: R5.1 49.23,12.73 49.23,12.93 45.56,16.6 45.56,17.64 44.87,18.34 D9.2 44.87,18.4 44.87,24.84 | 44.87,24.84 48.81,28.79 48.81,40.98 47.64,42.16 47.64,42.43 U1.1 | U2.12 22.98,36.2 22.98,35.99 33.93,25.05 44.59,25.05 44.8,24.84 44.87,24.84
GDR
  Top 0.15: J1.2 89.25,14.74 89.25,15.15 89.46,15.36 113.28,15.36 126.58,2.06 135.44,2.06 164.87,31.48 164.87,37.76 164.14,38.49 Q3.1 164.18,38.83 165.43,40.08 165.43,43.75 R4.2
GND  (via drill 0.3, 0.35)
  Top 0.3: R2_BAT.1 41.89,53.31 43,53.31 44.24,52.06 45,52.06 45.56,52.62 45.56,52.96 MCP73831.2 45.63,53.1 45.63,53.38 46.18,53.93 47.36,53.93 47.57,53.72 50.2,53.72 50.89,54.41 C2_BAT.2 50.96,54.55 50.96,55.59 55.6,60.23 56.29,60.23 C1_BAT.2 56.5,60.23 66.61,60.23 | SENSOR2.1 69.52,43.34 71.32,43.34 71.8,42.85 73.05,42.85 73.26,43.06 73.26,43.68 72.77,44.17 72.43,44.17 SENSOR2.7 72.91,44.23 73.26,44.58 73.26,45.27 72.88,45.66 | 72.88,45.66 72.77,45.76 72.43,45.76 SENSOR2.5 | 81.15,56.87 81.15,57.12 U4.9 81.08,57.25 81.08,57.46 80.67,57.88 80.25,57.88 U4.1 80.04,57.88 79.35,58.57 73.26,58.57 C1.2 73.12,58.64 69.1,58.64 C2.2 68.96,58.71 67.44,60.23 66.61,60.23 | 81.15,56.87 81.15,56.84 80.67,56.35 80.25,56.35 U4.4 80.46,56.22 80.46,49.98 | 80.46,49.98 80.46,49.22 C10_SUPERCAP.1 80.25,49.01 80.32,49.08 84.68,49.08 85.38,48.39 C8.2 85.31,48.25 84.62,47.56 82.88,47.56 80.67,45.34 80.67,44.93 U3.13 | 72.88,45.66 77.21,49.98 80.46,49.98 | 52.41,105.73 52,105.31 52,103.79 C6.2 | 52.41,105.73 52.41,106.98 51.58,107.81 51.45,107.81 BOOT_BUTTON.1 51.24,107.88 47.91,107.88 BOOT_BUTTON.2 47.77,107.74 29.01,107.74 28.18,106.91 28.04,106.84 | 64.5,104.73 63.84,105.38 63.7,105.38 63.49,105.59 | 64.5,104.73 65.57,103.65 68.76,103.65 C5.2 | 63.49,105.59 63.49,106.84 64.33,107.67 64.46,107.67 RESET_BUTTON.2 64.6,107.74 67.99,107.74 RESET_BUTTON.1 | 64.5,104.73 63.08,103.31 63.08,98.6 65.29,96.38 65.43,96.38 IC1.3 65.57,96.31 66.68,95.2 66.68,93.26 C_DELAY.2 66.61,93.13 66.61,60.23 | 52.41,105.73 52.55,105.66 63.36,105.66 63.49,105.59 | J4.G1 17.37,83.92 17.37,84.82 18.21,85.65 18.21,88.69 17.37,89.53 J4.G2 17.44,89.66 17.44,90.63 28.04,101.23 28.04,102.2 27.35,102.89 C10.2 27.28,103.03 27.28,104.83 28.04,105.59 28.04,106.84
  Top 0.3: 28.04,106.84 27.21,107.67 27.07,107.67 CHANGE_BUTTON.1 26.86,107.74 23.54,107.74 CHANGE_BUTTON.2 23.4,107.67 22.78,107.05 22.71,107.05 22.5,106.84 22.5,105.59 24.78,103.31 24.78,102.89 24.3,102.41 16.13,102.41 14.81,101.09 C9.2 14.67,101.02 14.67,98.46 7.4,91.19 6.78,91.19 J4.P6 | U2.29_1 13.5,42.3 13.5,43.47 U2.29_2 | U2.29_3 13.5,44.72 13.5,43.61 U2.29_2 | U2.29_1 13.63,42.3 14.67,42.3 U2.29_4 14.81,42.3 15.92,42.3 U2.29_7 15.99,42.43 15.99,43.47 U2.29_8 | U2.29_5 14.67,43.54 13.63,43.54 U2.29_2 | U2.29_3 13.63,44.79 14.67,44.79 U2.29_6 14.81,44.79 15.92,44.79 U2.29_9 | U2.29_3 13.43,44.86 9.06,49.22 9.06,53.72 U2.28 8.86,53.79 8.65,53.79 1.31,61.13 1.31,74.84 3.11,76.64 GND1.TP 3.11,76.85 3.11,80.8 J4.G3 3.04,81.01 3.04,87.72 6.36,91.05 J4.P6 | J4.P6 6.57,91.19 6.43,91.19 4.08,93.54 4.08,93.96 J4.G4 4.08,94.16 1.65,96.59 1.65,100.54 3.32,102.2 GND.TP | J2.B1 165.15,56.7 165.15,56.91 J2.A12 165.22,57.05 165.22,58.16 165.71,58.64 J2.MP4 | J2.MP4 165.85,58.71 169.65,58.71 J2.MP2 169.59,58.57 169.59,48.6 J2.MP1 | R2-USB1.1 151.72,61.06 155.67,61.06 158.5,58.22 158.5,57.81 D1.2 158.64,58.29 159.06,58.71 159.89,58.71 160.38,58.22 165.08,58.22 J2.MP4 | J3.1 167.85,17.5 169.24,17.5 172.77,21.04 172.77,45.41 169.72,48.46 J2.MP1 | R2.1 157.54,34.19 153.31,34.19 152.97,33.85 SJ1.1 | C5_USB.2 148.67,46.8 152.55,46.8 153.03,47.28 C4_USB.2 153.17,47.21 156.08,44.3 | 163.56,44.37 160.93,44.37 R2-USB.2 160.72,44.3 156.08,44.3 | 163.56,44.37 164.11,43.82 R4.1 | J2.B12 165.15,50.26 J2.A1 165.22,50.12 165.22,49.01 165.71,48.53 J2.MP3 | 163.56,44.37 163.63,44.51 163.63,46.38 165.64,48.39 J2.MP3
  Top 0.3: SJ1.1 152.83,33.92 152.48,33.92 151.79,34.61 151.79,39.94 156.01,44.17 156.08,44.3 | SJ1.1 152.41,33.78 136.21,17.57 136.21,13.28 C7.2 136.14,13.14 128.87,13.14 127.55,11.83 D3.1 127.41,11.69 v125.96,10.23 | J2.MP1 169.45,48.6 165.85,48.6 J2.MP3 | IC4.2 17.17,6.22 17.17,5.94 17.65,5.46 20.07,5.46 21.81,7.19 C1_BAT2.2 21.74,7.33 v21.18,7.88 | 8.06,9.92 8.44,9.54 8.44,7.46 C3.- | 8.06,9.92 6.57,11.41 6.57,12.31 R1_PWRUSB.1 | 21.15,12.62 21.11,12.66 10.79,12.66 10.69,12.55 | 21.15,12.62 21.88,11.89 C1_BAT1.2 | 8.06,9.92 10.69,12.55 | 10.69,12.55 9.06,14.18 9.06,36.2 U2.1 9.13,36.34 9.13,36.76 v10.93,38.56 | v21.18,12.66 21.15,12.62 | v32.26,15.57 32.26,16.33 D12.1 32.33,16.47 34.83,16.47 35.86,15.43 39.05,15.43 40.37,16.74 D10.1 40.5,16.88 44.8,16.88 D9.1 44.87,16.74 45.49,16.12 v45.49,16.05 | EPD_C5.1 90.36,17.09 94.31,17.09 EPD_C2.1 94.45,17.16 95.14,17.85 95.14,18.75 94.79,19.1 87.38,19.1 87.18,18.89 87.04,18.82 | 92.16,12.24 93.55,12.24 94.17,12.87 EPD_C12.1 | 92.16,12.24 90.71,12.24 J1.MP1 90.57,12.31 88.08,12.31 86.21,14.18 86.21,14.6 J1.8 86.14,14.74 86.14,15.5 85.52,16.12 85.45,16.26 | 85.45,16.26 82.81,16.26 81.71,15.15 81.71,14.74 J1.17 | 85.45,16.26 86.21,17.02 EPD_C6.1 86.35,17.16 87.04,17.85 87.04,18.82 | 83.09,17.3 83.99,17.3 85.72,19.03 86.83,19.03 87.04,18.82 | 83.09,17.3 82.4,17.3 EPD_C7.1 | 83.09,17.3 83.09,19.03 82.88,19.24 77.69,19.24 77.48,19.03 77.48,18.06 78.24,17.3 EPD_C8.1 | 92.16,11.13 78.24,11.13 77.27,12.1 J1.MP2 77.14,12.24 77.14,14.11 74.09,17.16 EPD_C9.1 73.95,17.09 69.73,12.87 69.17,12.87 EPD_C10.1 69.03,12.93 v68.06,13.9
  Top 0.3: 92.16,11.13 98.53,11.13 100.27,12.87 100.27,14.04 99.64,14.67 99.23,14.67 EPD_C1.1 | v92.16,12.03 92.16,12.24 | v92.16,11.06 92.16,11.13 | 66.33,17.09 67.3,18.06 67.3,18.89 EPD_C11.1 | 66.33,17.09 53.45,17.09 D6.1 53.32,16.95 52.48,16.95 v51.58,16.05 | U1.4 47.57,38.7 47.57,38.9 46.39,40.08 46.39,42.37 47.01,42.99 49.02,42.99 51.45,40.56 U1.9 51.38,40.43 51.38,30.8 47.84,27.27 47.84,18.54 49.23,17.16 D8.1 49.3,16.88 49.58,16.6 v49.58,16.05 | v67.03,14.94 67.03,16.33 66.4,16.95 66.33,17.09 | v10.93,39.73 13.36,42.16 U2.29_1 | U4.6 81.15,56.87
  Bottom 0.3: v21.18,7.88 v21.18,12.66 21.32,12.73 30.81,12.73 32.26,14.18 v32.26,15.57 | v92.16,12.03 v92.16,11.06 92.3,11 95.42,11 96.18,10.23 v125.96,10.23 | v51.58,16.05 v49.58,16.05 v45.49,16.05 | v67.03,14.94 v68.06,13.9 | v10.93,38.56 v10.93,39.73
  other vias: 22.4,17.8 44.7,3.3 25.2,5.9 12.2,77.1 7.7,56.9 149.4,17.5 145.3,51.9 155.4,53.2 154.6,55.2 137.5,5 132.8,3.8 132.7,9.7 30.3,15.4 39.3,12 63.8,56.2 115.8,52.5 56.4,53.3 77.2,56.1 76.3,49.8 56.9,14.4 107.3,12.8 11,19.5 85.3,16.5 25.5,22.2 18.4,24.3 32.2,28.3 36.2,31 58.5,20.8 70.6,24.5 53.4,49.1 35.1,55.8 61.4,45.4 50.3,29.6 18.9,44.1 63.4,31.9 37.5,40.6 61.6,42.2 53.8,33.7 43,34.1 20.3,41.4 18.6,49.1 23.9,56 36.2,45.2 16.6,37.6 15,32.4 23,49.6 11.4,56.3 15.8,48.6 70.6,47.8 81.2,33.3
  pour Top: 76.56,6.26 76.58,6.28 91.22,6.28 91.24,6.26 91.26,6.24 91.28,6.22 91.28,-1.42 174.62,-1.42 174.62,67.72 94.28,67.72 94.26,67.74 94.24,67.76 94.22,67.78 94.22,69.32 94.24,69.34 94.26,69.36 94.28,69.38 95.92,69.38 95.92,113.82 -1.42,113.82 -1.42,-1.12 77.02,-1.12 77.02,-0.38 76.58,-0.38 76.56,-0.36 76.54,-0.34 76.52,-0.32 76.52,6.22 76.54,6.24
  pour Bottom: 76.46,6.76 76.48,6.78 90.82,6.78 90.84,6.76 90.86,6.74 90.88,6.72 90.88,-2.42 91.02,-2.42 91.02,-1.28 91.04,-1.26 91.06,-1.24 91.08,-1.22 175.42,-1.22 175.42,67.92 95.68,67.92 95.66,67.94 95.64,67.96 95.62,67.98 95.62,114.62 -1.22,114.62 -1.22,-0.42 76.42,-0.42 76.42,6.72 76.44,6.74
GPIO8
  Top 0.15: R1.1 12.39,31.15 12.39,31.91 14.6,34.12 18.55,34.12 20.42,35.99 20.42,36.2 U2.10
I2C_PW
  Top 0.15: 71.18,57.32 73.05,57.32 73.12,57.39 C1.1 | 71.18,57.32 69.1,57.32 C2.1 | 71.18,57.32 71.18,53.93 R1-PINH.2 71.18,53.86 71.32,53.72 71.32,49.98 R2-PINH.2 71.39,49.91 71.39,45.76 72.15,45 SENSOR2.6 72.36,44.93 72.15,44.93 71.46,44.23 71.39,44.23 | 71.39,44.23 69.52,44.23 SENSOR2.2 69.45,44.23 32.26,44.23 22.98,53.52 22.98,53.72 U2.17 | SENSOR2.8 72.36,43.4 72.15,43.4 71.39,44.17 71.39,44.23
INT_RTC  (via drill 0.3)
  Top 0.15: v17.93,35.09 17.93,36.2 U2.8 | v18.14,33.64 13.22,28.72 v13.15,28.72 | v4.15,11.83 3.18,10.86 INT_RTC.TP | v170.76,13.83 171.52,13.07 R1_PINH1.1 | v84.62,31.7 84.13,32.19 84.13,33.09 82.88,34.33 80.32,34.33 79.42,35.23 79.42,35.58 U3.3 79.35,35.65 79.35,35.99 73.81,41.53 70.28,41.53 67.93,43.89 v26.79,43.89
  Bottom 0.15: v18.14,33.64 17.93,33.85 v17.93,35.09 18,35.09 v26.79,43.89 | v13.15,28.72 13.15,24.08 4.15,15.08 v4.15,11.83 | v170.76,13.83 141.68,13.83 123.81,31.7 v84.62,31.7
IO/BOOT
  Top 0.15: 49.64,106.35 BOOT_BUTTON.4 | 49.64,106.35 47.91,106.35 BOOT_BUTTON.3 | 49.64,102.68 51.72,102.68 51.93,102.48 C6.1 | 49.64,102.68 47.98,102.68 R_BOOT.1 47.98,102.61 25.55,80.18 25.55,53.79 U2.15 | 49.64,102.68 49.64,106.35
IO/CHANGE
  Top 0.15: 25.27,106.21 CHANGE_BUTTON.4 | 25.27,106.21 23.54,106.21 CHANGE_BUTTON.3 | 25.27,101.71 27.21,101.71 C10.1 | 25.27,101.71 23.4,101.71 R_CHANGE.1 23.4,101.64 15.37,93.61 15.37,53.79 U2.23 | 25.27,101.71 25.27,106.21
MISO  (via drill 0.3)
  Top 0.15: 5.26,95.07 5.26,96.24 2.07,99.43 2.07,100.4 3.32,101.64 3.8,101.64 4.56,102.41 4.56,104.28 3.32,105.52 MISO.TP | 5.26,95.07 5.26,93.61 6.57,92.3 6.85,92.3 J4.P7 | R8.1 36.28,12.52 35.17,12.52 32.61,15.08 32.12,15.08 31.64,15.57 31.64,17.37 32.26,17.99 D12.2 32.33,18.06 v38.84,24.57 | v46.94,40.5 46.94,40.56 47.57,41.19 U1.2 | v22.29,46.24 17.51,46.24 10.31,53.45 10.31,53.72 U2.27 10.24,53.79 10.24,54 9.48,54.76 8.23,54.76 1.86,61.13 v1.86,62.1 | v5.12,95.07 5.26,95.07
  Bottom 0.15: v38.84,24.57 46.94,32.67 v46.94,40.5 46.87,40.5 41.13,46.24 v22.29,46.24 | v5.12,95.07 5.12,70.55 1.86,67.3 v1.86,62.1
MOSI  (via drill 0.3)
  Top 0.15: v5.6,88.62 6.36,87.86 6.85,87.86 J4.P3 6.99,87.86 7.61,87.86 14.88,80.59 v14.88,55.18 | v5.6,106.49 MOSI.TP | v81.36,13.35 82.75,13.35 83.16,13.77 83.16,14.67 J1.14 | v41.4,12.38 40.78,12.38 40.64,12.52 R7.1 | v50.06,14.6 50.06,18.34 55.15,23.42 55.15,38.42 U1.5 | v38.15,15.98 36.14,17.99 D11.2 | v16.68,35.09 16.68,36.2 U2.7 | v22.78,47.28 22.78,47.07 23.26,46.59 v23.26,41.81
  Bottom 0.15: v5.6,106.49 v5.6,88.62 | v81.36,13.35 80.39,12.38 50.06,12.38 | 50.06,12.38 v41.4,12.38 41.4,12.45 38.15,15.7 v38.15,15.98 35.17,15.98 16.68,34.47 v16.68,35.09 16.68,35.23 v23.26,41.81 | 50.06,12.38 v50.06,14.6 | v22.78,47.28 v14.88,55.18
N$1  (via drill 0.3)
  Top 0.15: v161.69,43.82 160.93,43.06 R2-USB.1 | v164.18,54.9 164.6,55.31 165.15,55.31 J2.B5
  Bottom 0.15: v161.69,43.82 161.69,52.41 v164.18,54.9
N$2  (via drill 0.3)
  Top 0.15: v153.24,58.22 150.4,61.06 R2-USB1.2 | v159.06,52.41 165.15,52.41 J2.A5
  Bottom 0.15: v159.06,52.41 v153.24,58.22
N$3
  Top 0.15: 16.61,6.77 16.75,6.91 17.51,6.91 | 16.61,6.77 16.54,6.7 16.54,6.63 16.2,6.29 IC4.1 | 17.51,6.91 18,6.43 18,6.29 IC4.3 | 16.61,6.77 11.56,11.83 11.28,11.83 D2.1 | 20.63,11.06 20.63,10.72 18.62,8.71 18.62,8.09 17.51,6.98 17.51,6.91 | 20.63,11.06 20.63,11.83 C1_BAT1.1 | 20.63,11.06 64.6,11.06 102.07,48.53 139.88,48.53 140.5,47.91 141.26,47.91 Q1.2
N$4
  Top 0.15: 130.32,3.31 128.24,3.31 127.73,2.8 D4.1 | C4.1 133.71,2.82 132.29,2.82 131.73,3.38 130.41,3.38 130.34,3.31 130.32,3.31 | 130.32,3.31 130.32,8.29 130.94,8.92 130.94,11.76 D3.2
N$5
  Top 0.15: CHG_LED.C 52.48,60.3 46.18,60.3 45.14,61.34 44.04,61.34 43.41,60.72 R1_BAT.1
N$6
  Top 0.15: R1_BAT.2 44.73,60.65 44.73,56.7 45.14,56.28 45.14,53.72 44.66,53.24 44.66,53.03 MCP73831.1
N$7
  Top 0.15: R2_BAT.2 41.89,54.69 43.76,54.69 44.59,55.52 MCP73831.5
N$8
  Top 0.15: J1.24 78.24,14.67 78.24,13.63 80.32,11.55 98.4,11.55 99.85,13 99.85,13.9 99.64,14.11 94.31,14.11 94.24,14.18 EPD_C12.2
N$9
  Top 0.15: J1.20 80.18,14.74 80.18,16.67 78.31,18.54 EPD_C8.2
N$10  (via drill 0.3)
  Top 0.15: v78.8,13.9 79.14,14.25 79.14,14.67 J1.22 | v69.93,13.9 69.38,13.9 69.17,14.11 EPD_C10.2
  Bottom 0.15: v69.93,13.9 v78.8,13.9
N$11
  Top 0.15: J1.19 80.74,14.74 80.74,16.95 82.33,18.54 EPD_C7.2
N$12
  Top 0.15: J1.18 81.22,14.74 81.22,15.22 82.68,16.67 84.55,16.67 86.21,18.34 EPD_C6.2
N$13
  Top 0.15: J1.5 87.73,14.74 87.73,15.63 89.95,17.85 93.89,17.85 94.31,18.27 EPD_C2.2
N$14
  Top 0.15: J1.4 88.22,14.67 88.22,14.32 89.05,13.49 99.16,13.49 EPD_C1.2
N$15
  Top 0.15: C_DELAY.1 67.93,93.26 67.93,95.69 67.65,95.97 67.65,97.49 68.34,98.18 IC1.5
N$16
  Top 0.15: R_CAPACITOR.1 83.51,32.6 79.35,32.6 78.59,33.36 76.65,33.36 76.03,32.74 D7.1
PREVGH
  Top 0.15: 77.07,16.67 75.89,16.67 74.09,18.47 EPD_C9.2 | 77.07,16.67 78.11,16.67 79.63,15.15 79.63,14.74 J1.21 | 77.07,16.67 77.07,19.17 77.55,19.65 109.41,19.65 121.25,7.81 127.55,7.81 D5.1
PREVGL  (via drill 0.3)
  Top 0.15: v77.55,16.19 78.66,15.08 78.66,14.74 J1.23 | v66.68,18.2 66.68,18.34 66.13,18.89 EPD_C11.2 | v130.11,2.82 130.23,2.7 D4.2
  Bottom 0.15: v66.68,18.2 68.69,16.19 v77.55,16.19 77.62,16.19 80.32,18.89 88.7,18.89 92.23,15.36 127.48,15.36 131.91,10.93 131.91,10.65 130.11,8.85 v130.11,2.82
RESE  (via drill 0.3)
  Top 0.15: v112.59,15.84 89.46,15.84 88.7,15.08 88.7,14.74 J1.3 | v139.05,15.84 144.59,15.84 162.66,33.92 162.66,35.02 162.18,35.51 | 162.18,35.51 161.97,35.72 161.69,35.72 R3.2 | 162.18,35.51 164.09,37.43 Q3.2
  Bottom 0.15: v139.05,15.84 v112.59,15.84
RESE'
  Top 0.15: R3.1 161.62,34.47 161.41,34.47 160.38,35.51 157.6,35.51 R2.2 157.54,35.51 157.4,35.37 152.97,35.37 SJ1.2
RESET  (via drill 0.3)
  Top 0.15: RESET_BUTTON.3 64.53,106.21 RESET_BUTTON.4 68.06,106.15 68.06,105.45 69.45,104.07 69.45,102.96 68.83,102.34 C5.1 68.76,102.27 68.69,102.2 65.57,102.2 | 65.57,102.2 64.53,102.2 R_RESET.1 | 65.57,102.2 65.57,98.87 | 65.57,98.87 65.57,98.25 IC1.1 | v23.75,52.13 23.75,41.67 20.84,38.76 12.8,38.76 11.56,37.52 11.56,36.27 U2.3 | v26.86,60.23 v26.86,55.25 | v65.5,98.87 65.57,98.87
  Bottom 0.15: v23.75,52.13 v26.86,55.25 | v65.5,98.87 v26.86,60.23
RTC_RST  (via drill 0.3)
  Top 0.15: v30.46,47.28 24.3,53.45 24.3,53.72 U2.16 | v79.56,37.03 80.6,35.99 80.6,35.65 U3.4
  Bottom 0.15: v30.46,47.28 68.55,47.28 78.8,37.03 v79.56,37.03
RX
  Top 0.15: U2.24 14.05,53.79 14.05,54.76 3.18,65.63 RX.TP
SCK  (via drill 0.3)
  Top 0.15: J4.P5 6.85,90.01 6.36,90.01 4.36,88 4.36,74.43 3.18,73.25 SCK.TP 3.11,73.18 3.11,71.1 1.86,69.86 1.86,64.53 v3.45,62.93 | v80.25,12.87 82.68,12.87 83.65,13.83 83.65,14.67 J1.13 | v51.24,12.87 49.99,11.62 45.97,11.62 45,12.59 R6.1 | v51.24,21.11 51.79,21.66 51.79,36.06 55.32,39.6 55.32,39.87 U1.6 | v43.97,18.27 D10.2 | v18.41,34.61 16.54,34.61 15.37,35.79 15.37,36.2 U2.6 15.57,35.51 v15.16,35.09
  Bottom 0.15: v51.24,12.87 52.34,12.87 | 52.34,12.87 v80.25,12.87 | 51.24,18.27 51.24,17.02 52.34,15.91 52.34,12.87 | 51.24,18.27 v51.24,21.11 | 51.24,18.27 v43.97,18.27 43.9,18.27 27.55,34.61 v18.41,34.61 | v3.45,62.93 14.05,52.34 14.05,34.96 14.4,34.61 14.67,34.61 v15.16,35.09
SCL  (via drill 0.3)
  Top 0.15: SENSOR2.4 69.52,45.83 70,46.31 70,49.91 R2-PINH.1 70.07,49.98 v70.07,51.44 | v82.81,51.16 82.81,57.12 82.61,57.32 82.19,57.32 U4.7 | v77.97,46.31 76.86,45.2 76.86,44.93 U3.16 | v164.39,20.48 167.78,20.48 J3.4 | v21.18,51.51 19.17,53.52 19.17,53.72 U2.20
  Bottom 0.15: v164.39,20.48 135.38,49.5 84.55,49.5 82.88,51.16 v82.81,51.16 v77.97,46.31 77.9,46.31 72.7,51.51 70.07,51.51 | 70.07,51.51 v21.18,51.51 | 70.07,51.51 v70.07,51.44
SDA  (via drill 0.3)
  Top 0.15: v81.15,58.16 81.57,58.16 81.85,57.88 82.12,57.88 U4.8 | v70.63,54.69 69.86,53.93 R1-PINH.1 69.8,53.86 68.76,52.82 68.76,45.48 69.24,45 69.45,45 SENSOR2.3 69.52,44.93 v71.53,44.93 | v166.61,19.51 167.78,19.51 J3.3 | v25.06,58.64 20.49,54.07 20.49,53.79 U2.19 | v77.48,43.75 78.11,44.37 78.11,44.86 U3.15
  Bottom 0.15: v166.61,19.51 127.97,58.16 v81.15,58.16 74.09,58.16 v70.63,54.69 70.56,54.69 65.78,59.47 53.45,59.47 52.62,58.64 v25.06,58.64 | v77.48,43.75 72.7,43.75 v71.53,44.93
SRC
  Top 0.15: 135.1,5.25 135.1,2.82 C4.2 | 135.1,5.25 135.93,6.08 L1.1 136,6.15 138.84,8.99 138.84,11.2 138.56,11.48 138.56,15.98 138.91,16.33 144.66,16.33 162.38,34.06 162.38,34.89 162.25,35.02 161.28,35.02 161,35.3 161,36.76 164.74,40.5 164.74,44.17 165.08,44.51 165.91,44.51 166.05,44.37 166.05,43.27 165.98,43.2 165.98,38.39 Q3.3 | D5.2 131.15,7.74 132.54,7.74 135.03,5.25 135.1,5.25
SS_SD  (via drill 0.3)
  Top 0.15: 51.96,12.9 51.1,13.77 51.1,16.19 53.38,18.47 D6.2 | 51.96,12.9 52.48,12.38 53.52,12.38 R10.1 | v4.7,64.8 4.7,84.89 6.57,86.76 7.26,86.76 J4.P2 | v12.04,37.38 12.04,37.24 12.8,36.48 12.8,36.27 U2.4 12.8,36.2 12.8,35.99 11.21,34.4 11.21,30.04 14.74,26.51 14.74,21.8 14.4,21.45 14.4,18.68 14.74,18.34 16.61,18.34 23.61,11.34 50.41,11.34 51.96,12.9
  Bottom 0.15: v4.7,64.8 2.97,63.07 2.97,59.75 12.04,50.68 v12.04,37.38
TX
  Top 0.15: U2.25 12.8,53.79 12.8,54 5.26,61.55 3.18,61.55 TX.TP
USB_D+  (via drill 0.3)
  Top 0.15: v91.96,48.81 140.36,48.81 140.98,49.43 140.98,49.57 147.77,56.35 158.37,56.35 159.47,57.46 159.47,57.74 D1.1 | v37.11,36.55 v48.33,36.55 | v26.38,36.55 25.82,36.55 25.55,36.27 U2.14
  Bottom 0.15: v91.96,48.81 79.7,36.55 v48.33,36.55 | v26.38,36.55 v37.11,36.55
USB_D-  (via drill 0.3)
  Top 0.15: v83.3,51.99 89.05,57.74 157.6,57.74 D1.3 | v50.41,51.99 50.2,51.99 42.93,44.72 v32.47,44.72 | v25.13,37.38 24.3,36.55 24.3,36.27 U2.13
  Bottom 0.15: v50.41,51.99 v83.3,51.99 | v25.13,37.38 v32.47,44.72
VBAT  (via drill 0.3)
  Top 0.3: v48.33,54.41 49.58,54.41 C2_BAT.1 | v47.22,53.31 46.87,53.31 46.6,53.03 MCP73831.3 | v4.22,68.33 3.18,69.37 VBAT.TP | U4.2 80.18,57.32 80.18,56.91 U4.3 80.04,56.91 79.7,56.91 v79.42,56.63 | v86.07,49.98 140.29,49.98 Q1.3
  Bottom 0.3: v4.22,68.33 14.6,68.33 29.56,53.38 47.08,53.38 v47.22,53.31 v48.33,54.41 48.47,54.35 59.27,54.35 59.96,53.65 76.38,53.65 79.28,56.56 v79.42,56.63 v86.07,49.98
VBUS  (via drill 0.3)
  Top 0.3: 147.42,48.11 147.42,53.1 PFMF.050.1.2 147.56,53.17 149.64,55.25 152.76,55.25 153.66,54.35 158.02,54.35 158.5,54.83 158.5,55.25 D1.5 | 147.42,48.11 147.42,46.8 C5_USB.1 147.29,47.07 140.78,47.07 139.99,47.86 Q1.1 139.32,47.95 139.32,47.98 v137.52,47.98 | 147.42,48.11 153.52,48.11 154.28,47.35 C4_USB.1 | MCP73831.4 46.6,55.59 49.78,58.78 52.48,58.78 CHG_LED.A 52.62,58.92 52.69,58.99 v53.59,58.99 | C1_BAT.1 56.29,58.99 v55.12,58.99 55.05,58.85 55.05,57.39 43.41,45.76 v31.36,45.76 | v8.79,13.7 6.57,13.7 R1_PWRUSB.2 | v10.38,13.7 11,13.7 11.21,13.9 D2.2 11.35,13.97 15.23,17.85 v15.99,17.85 | v3.18,5.53 3.18,3.17 VBUS.TP
  Bottom 0.3: v53.59,58.99 v55.12,58.99 55.25,58.99 60.1,54.14 70.83,54.14 73.88,57.18 128.31,57.18 v137.52,47.98 | v10.38,13.7 v8.79,13.7 8.65,13.63 8.09,13.63 3.18,8.71 v3.18,5.53 | v31.36,45.76 26.45,45.76 15.99,35.3 v15.99,17.85
VRTC
  Top 0.15: 80.6,46.45 79.42,45.27 79.42,44.93 U3.14 79.42,44.86 79.42,44.58 83.71,40.29 83.71,34.75 84.82,33.64 84.82,32.6 R_CAPACITOR.2 | 80.6,46.45 82.47,48.32 C8.1 | 80.6,46.45 78.11,48.94 C10_SUPERCAP.2
VUSB
  Top 0.3: J2.A4 165.15,51.09 165.15,51.3 J2.B9 | J2.A9 165.15,56.08 165.15,55.87 J2.B4 165.29,55.8 165.85,55.8 166.4,55.25 166.4,51.92 165.85,51.37 165.29,51.37 J2.B9 | J2.B9 165.01,51.37 153.66,51.37 151.93,53.1 PFMF.050.1.1